# Altium PCB My_PCB.PcbDoc (part 1 of 2)
Units mil, origin at the board's own origin, x right, y up, seen from the top; angles counter-clockwise.
Board outline 2405.51 x 3023.62 mil, 6 copper layers (L1 HS signal, L2 GND, L3 Signal, L4 5V, L5 Signal, L6 Signal), stack 61.068 mil thick; 56 components, 70 nets, 272 pads, 60 vias.
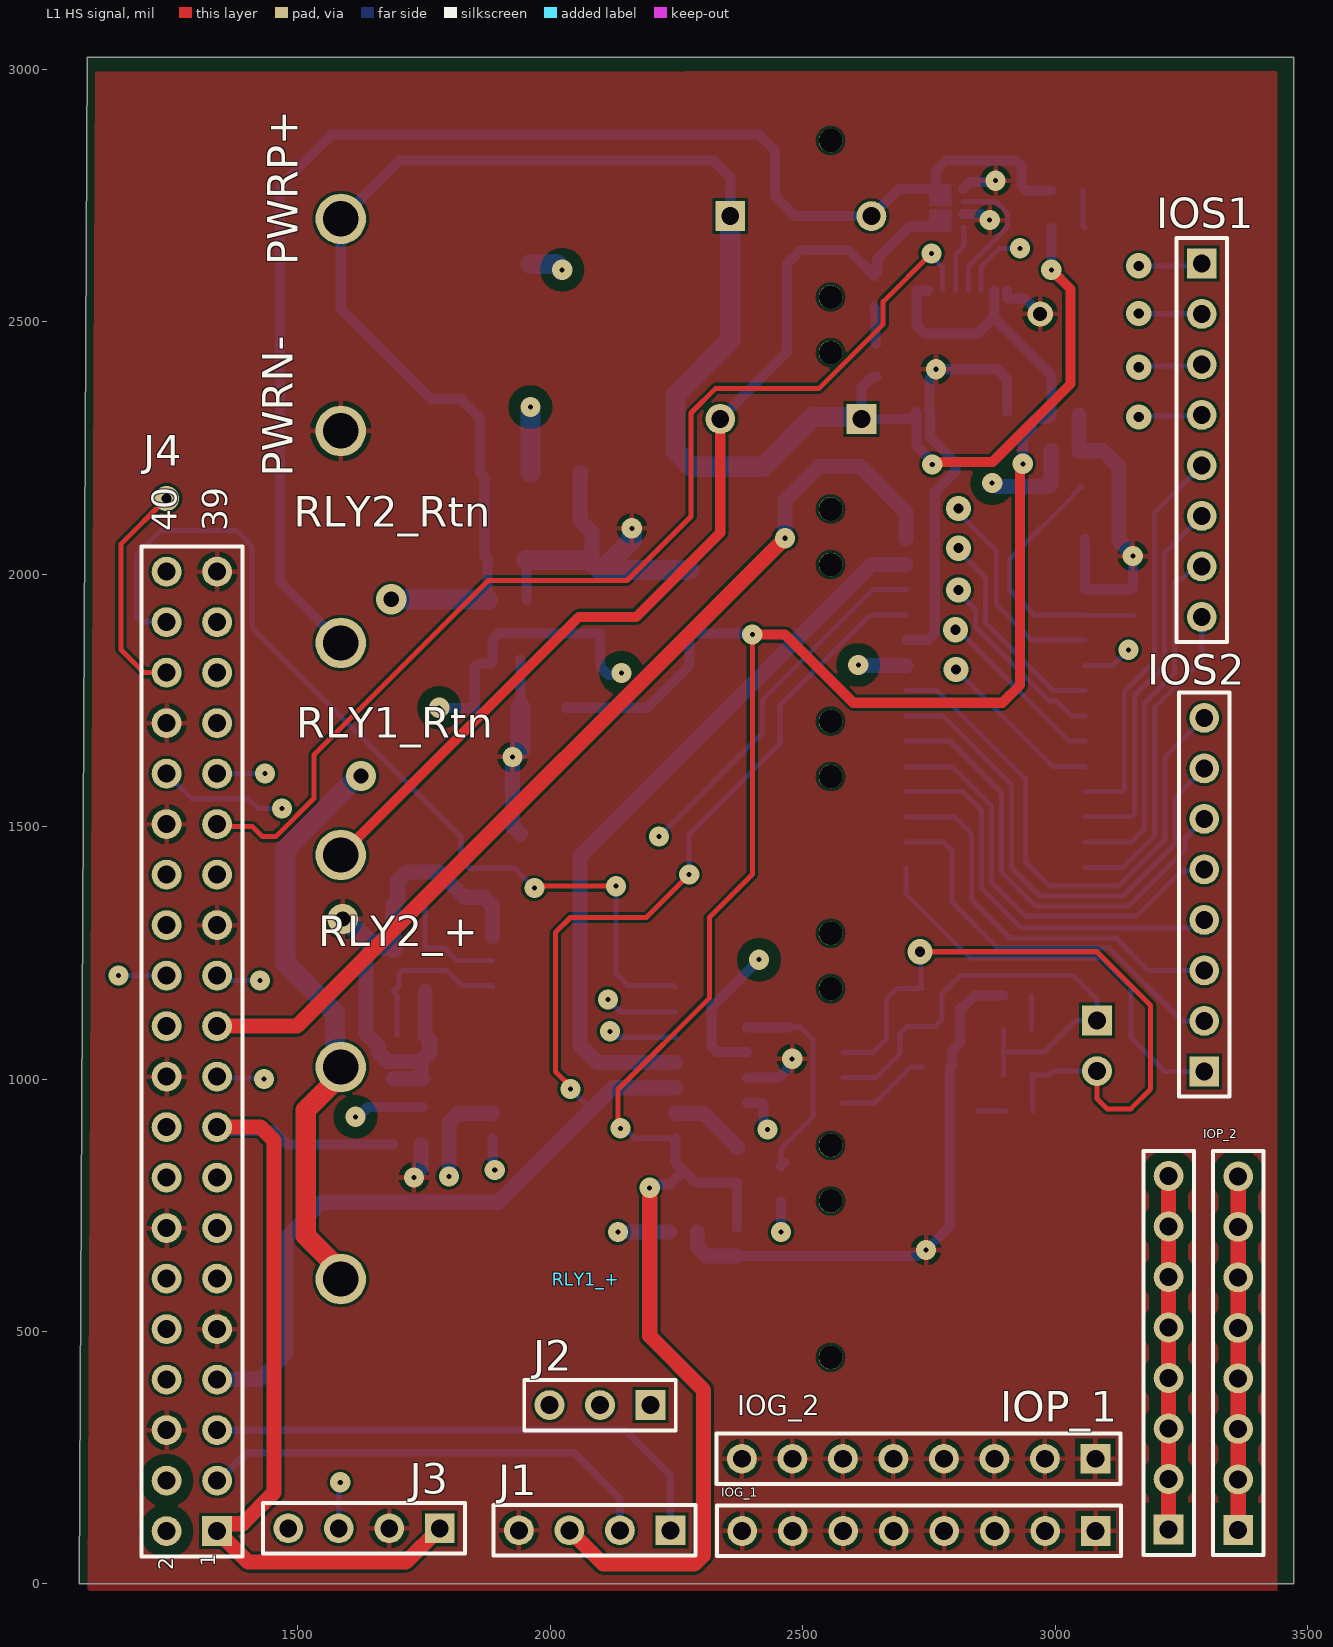
[diagram p0: L1 HS signal view]
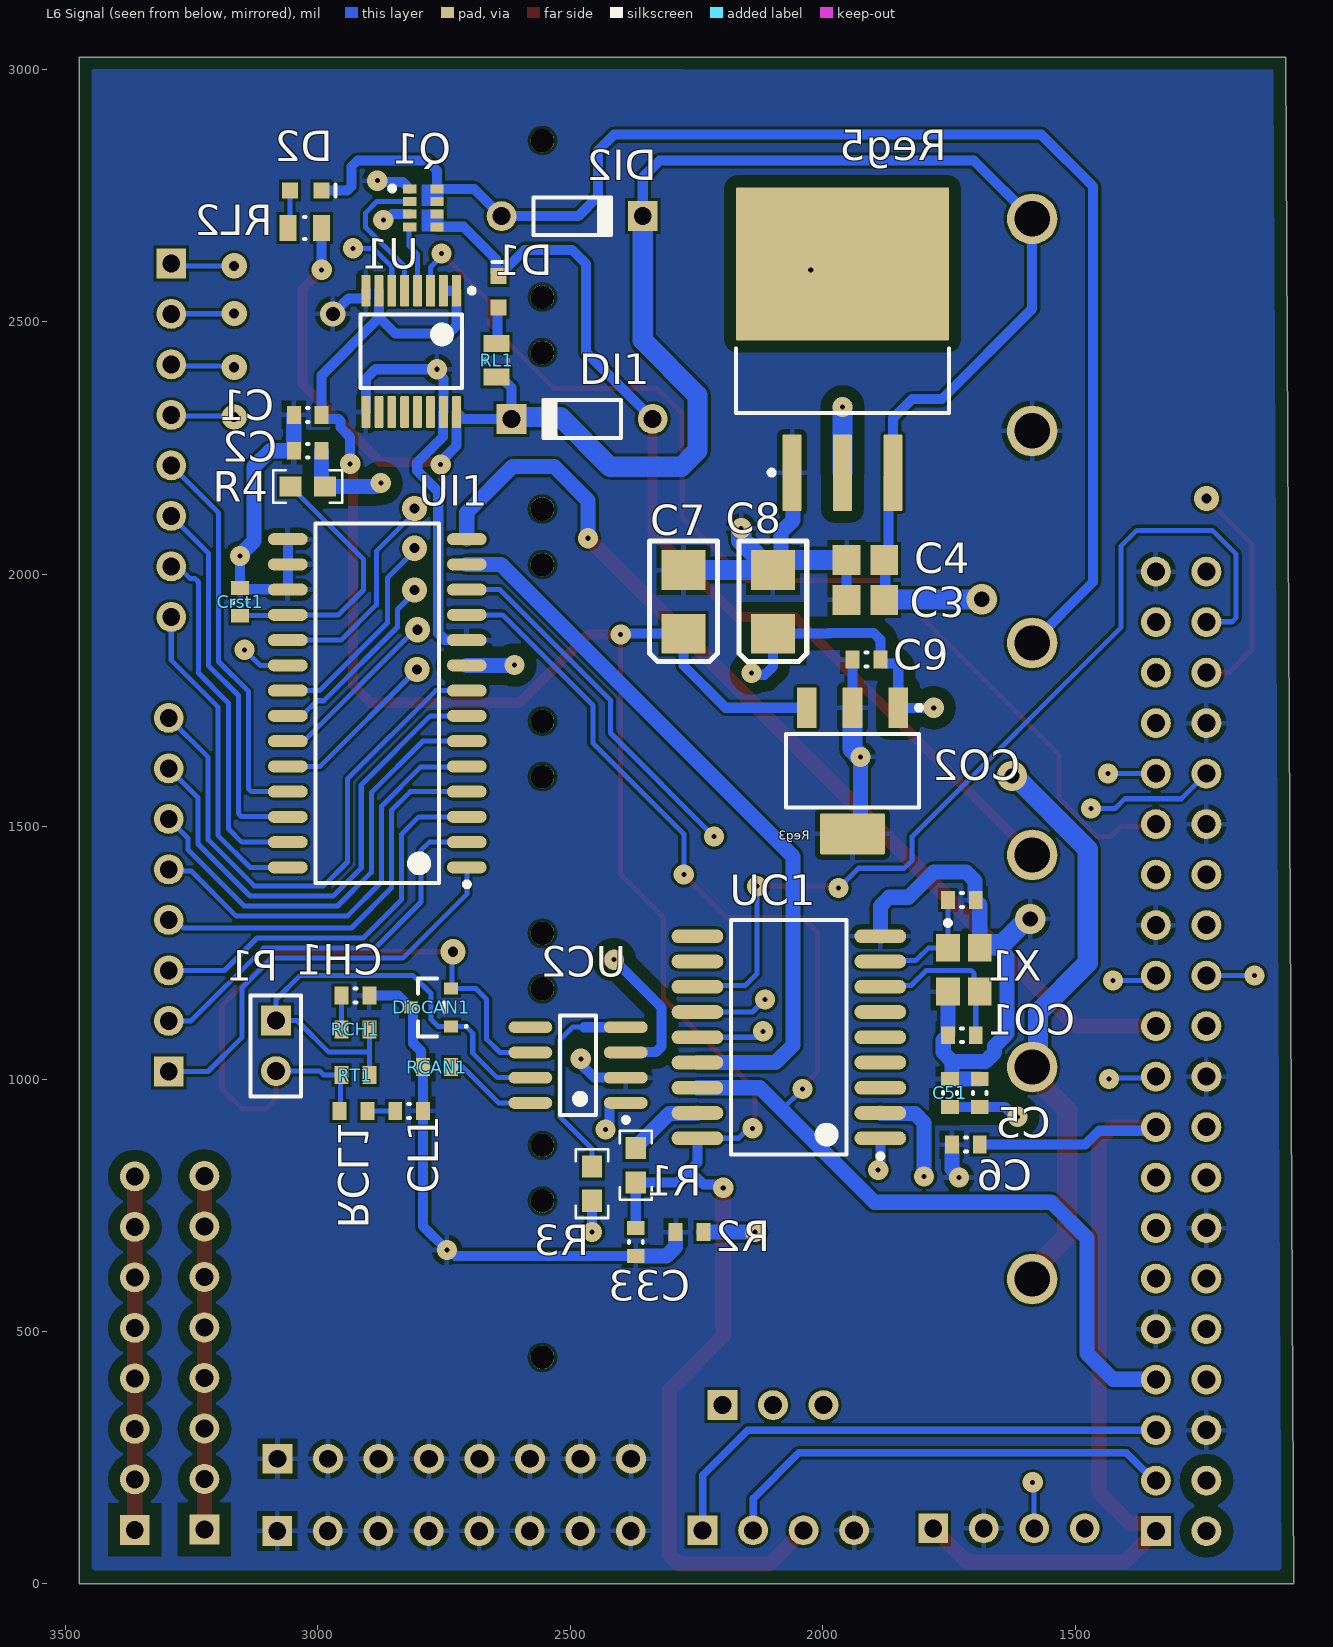
[diagram p1: L6 Signal view, seen from below]
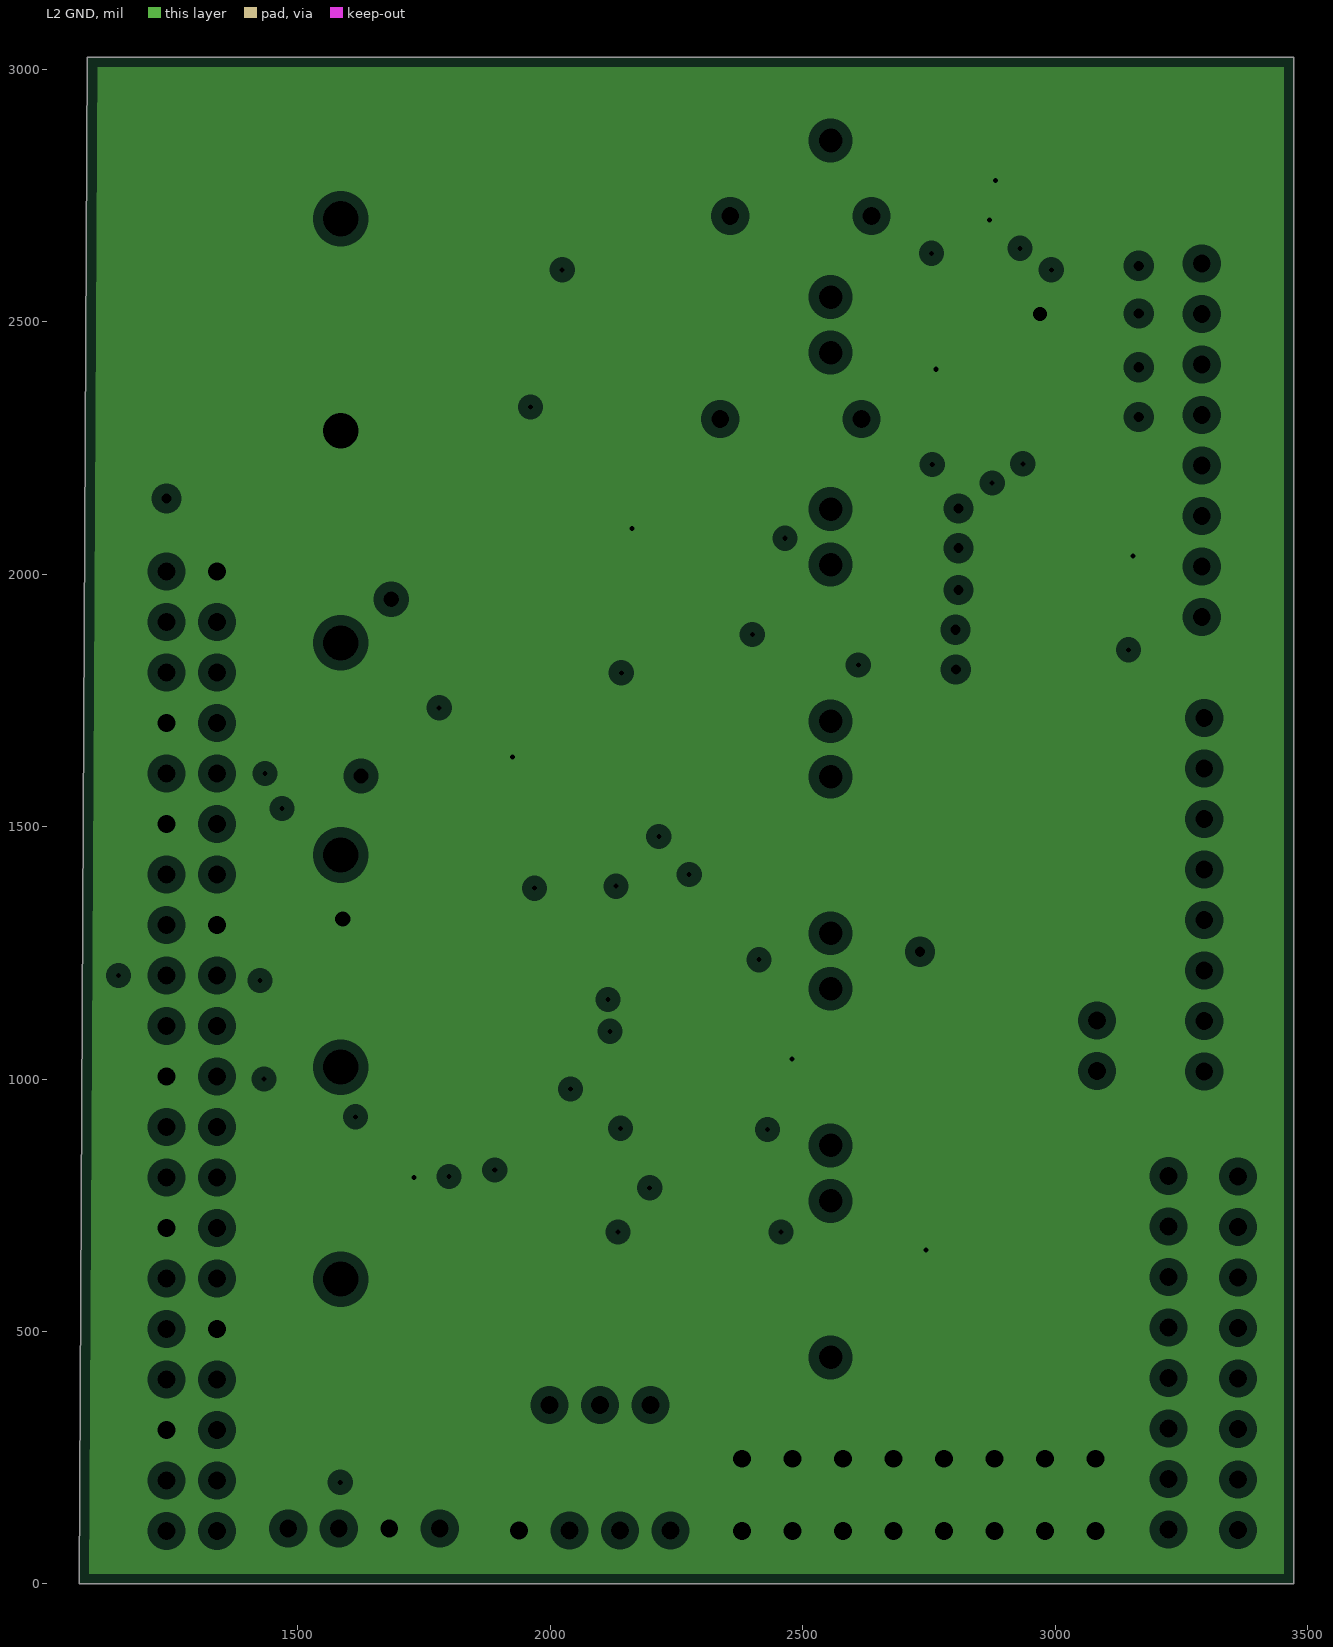
[diagram p2: L2 GND, clearances drawn from the general rule]
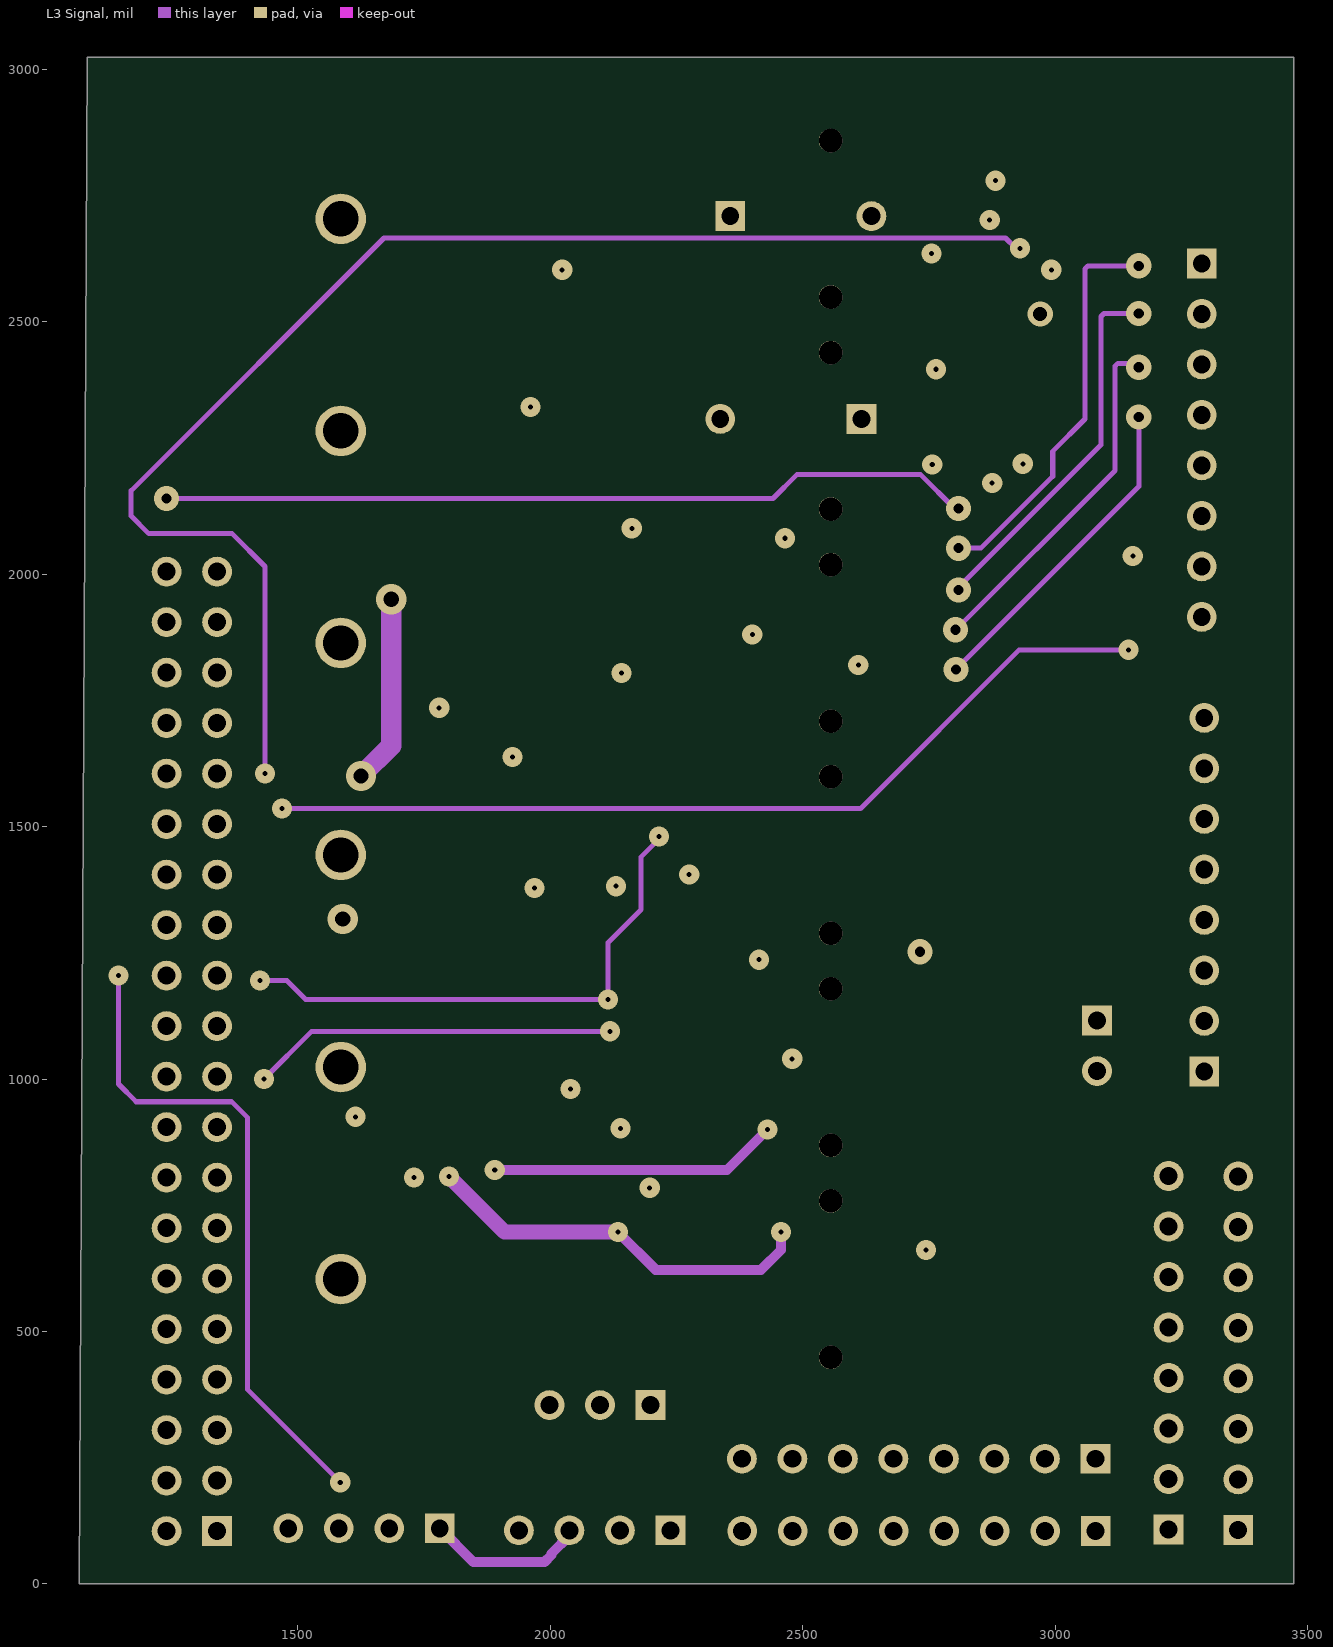
[diagram p3: L3 Signal]
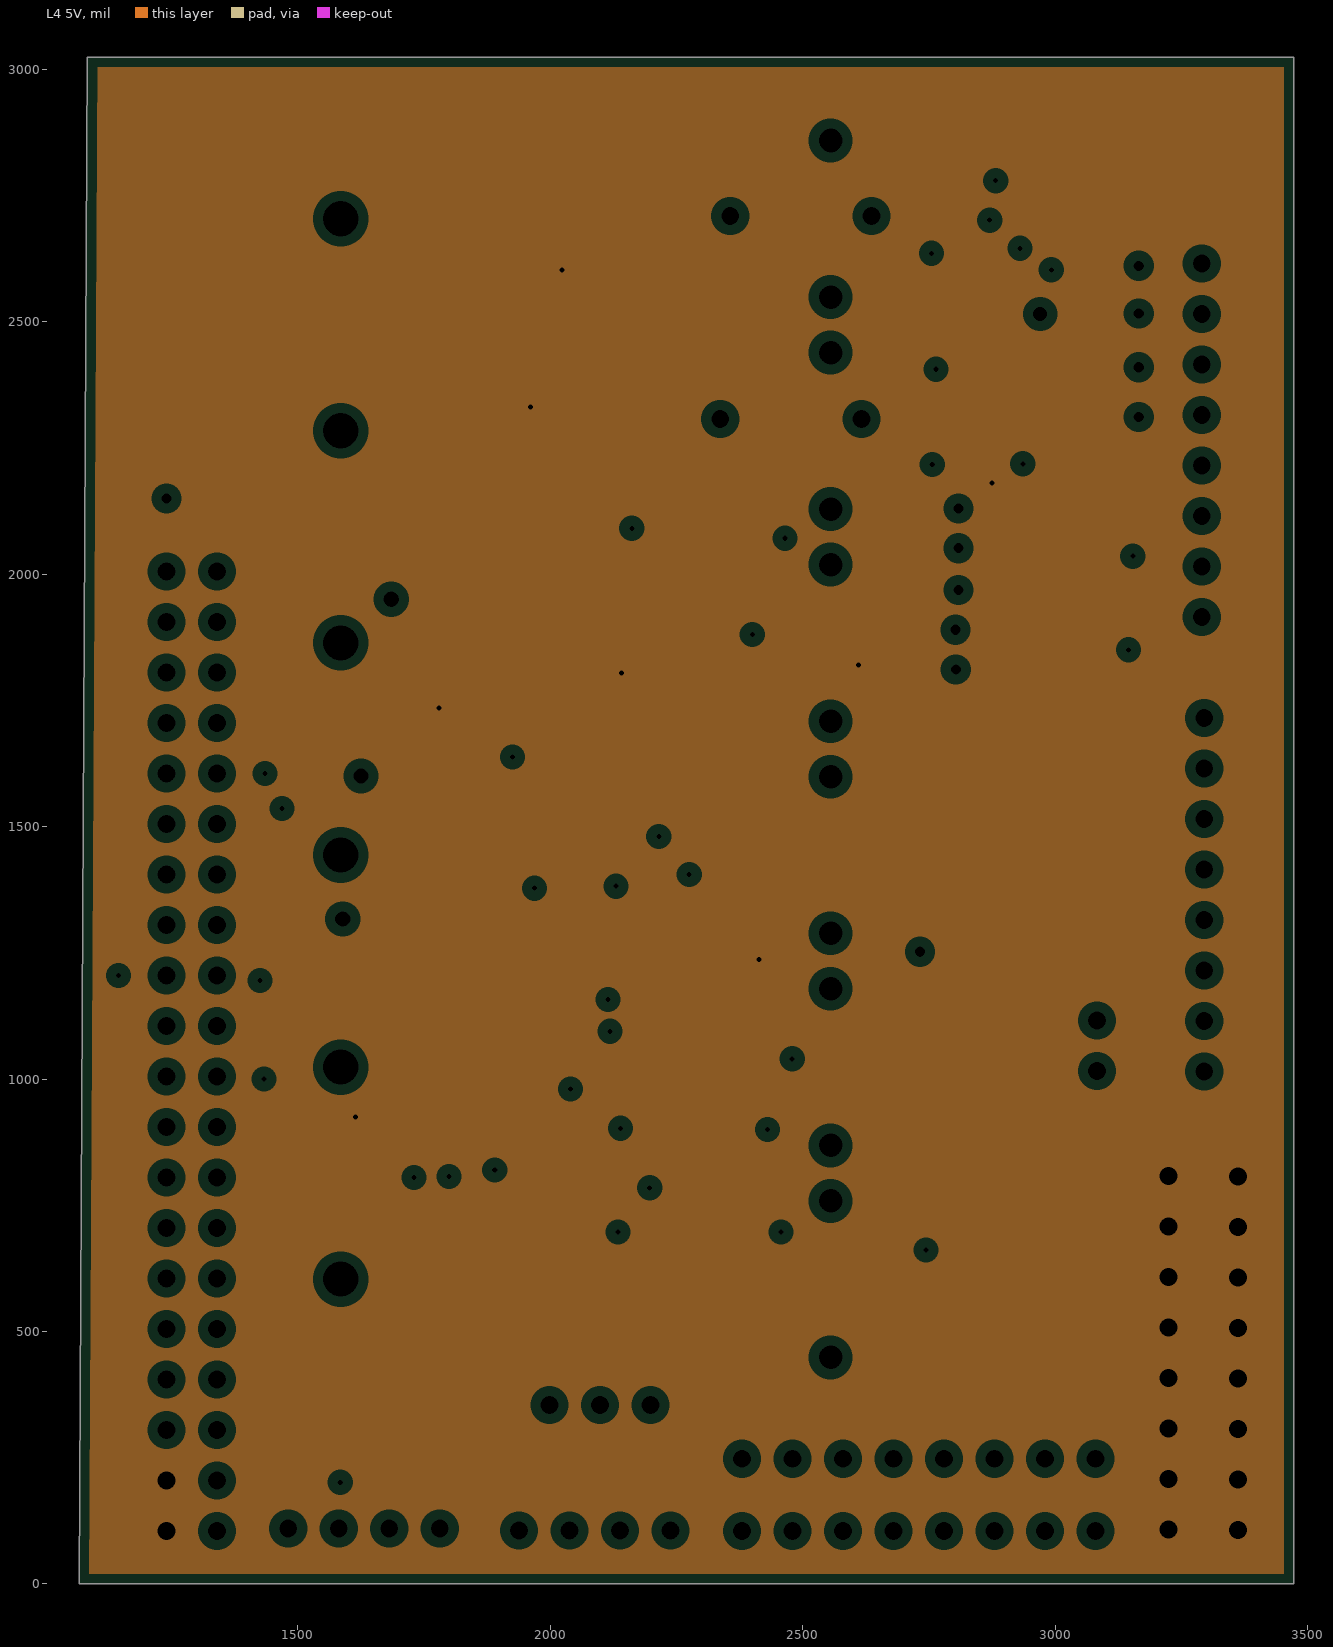
[diagram p4: L4 5V, clearances drawn from the general rule]

## Layer stack, top to bottom
Top Solder: solder mask 1, SM-001, Dk 4
L1 HS signal: signal copper 1.378
Dielectric 1: prepreg 2.8, PP-006, Dk 4.1
Dielectric 2: prepreg 2.8, PP-006, Dk 4.1
L2 GND: plane copper 1.378, net GND
Dielectric 3: core 18, Core-035, Dk 4.7
L3 Signal: signal copper 1.378
Dielectric 4: prepreg 2.8, PP-006, Dk 4.1
Dielectric 5: prepreg 2.8, PP-006, Dk 4.1
L4 5V: plane copper 1.378, net 5V
Dielectric 6: core 18, Core-035, Dk 4.7
L5 Signal: signal copper 1.378
Dielectric 7: prepreg 2.8, PP-006, Dk 4.1
Dielectric 8: prepreg 2.8, PP-006, Dk 4.1
L6 Signal: signal copper 1.378
Bottom Solder: solder mask 1, SM-001, Dk 4

## Board outline
1066.93,0 3472.44,0 3472.44,3023.62 1083.95,3023.62 1082.86,3022.54

## Design rules (kind name [scope] priority, off if disabled: settings)
AssemblyTestPointUsage [All] p1: valid=2
Clearance Power [InNet('5V') vs InNet('GND')] p1: gap=23 ignorepadtopadclearanceinfootprint=FALSE
Clearance Clearance_1 [All] p2: gap=5.5 ignorepadtopadclearanceinfootprint=FALSE
Clearance "Schematic Clearance Constraint" [InNetClass('CAN')] p3: gap=20 ignorepadtopadclearanceinfootprint=FALSE
ComponentClearance [(ObjectKind = 'Component') And (Footprint = 'Anderson_Red_RHT_BOT') vs (ObjectKind = 'Component') And (Footprint = 'Anderson_BLK_RHT_BOT')] p1: gap=10 collisioncheckmode=3 verticalgap=10 showdistances=TRUE
DiffPairsRouting [All] p1: maxlimit=10 minlimit=10 mostfreqgap=10 toplayer_minwidth=15 toplayer_maxwidth=15 toplayer_prefwidth=15 midlayer1_minwidth=15 midlayer1_maxwidth=15 midlayer1_prefwidth=15 midlayer2_minwidth=15 midlayer2_maxwidth=15 midlayer2_prefwidth=15 bottomlayer_minwidth=15 bottomlayer_maxwidth=15 bottomlayer_prefwidth=15 maxuncoupledlength=500
MinimumSolderMaskSliver [All] p1: minsoldermaskwidth=5
PlaneClearance [All] p1: clearance=20
PlaneConnect [All] p1: planeconnectstyle=Relief reliefexpansion=20 reliefentries=4 reliefconductorwidth=10 reliefairgap=10
PolygonConnect [All] p1: connectstyle=Relief reliefconductorwidth=10 reliefentries=4 polygonreliefangle="90 Angle" airgapwidth=10
RoutingVias [All] p1: holewidth=20 width=50 viastyle="Through Hole" minholewidth=10 minwidth=40 maxholewidth=30 maxwidth=60
SilkToSilkClearance [All] p1: silktosilkclearance=1
SilkToSolderMaskClearance [IsPad] p1: minsilkscreentomaskgap=2 clearancetoexposedcopper=TRUE
SolderMaskExpansion [All] p1: expansion=4 istentingtop=FALSE
Width Fonte [InNetClass('Fonte')] p1: maxlimit=40 minlimit=20 preferedwidth=30
Width "Schematic Width Constraint_2" [InNet('5V')] p2: maxlimit=30 minlimit=10 preferedwidth=20
Width "Schematic Width Constraint_1" [InNet('3V3')] p3: maxlimit=30 minlimit=10 preferedwidth=20
Width "Schematic Width Constraint" [InNetClass('CAN')] p4: maxlimit=30 minlimit=10 preferedwidth=20
22 further rules are at their usual default settings.

## Classes and differential pairs
net class PowerNets: NetD1_1 NetD2_1
net class RELAY[1..2]: RELAY1 RELAY2
net class Fonte: 5V 12V GND
net class CAN: CAN_RXD CAN_TXD CANH CANL
component class Relay_IO: D1 D2 DI1 DI2 Q1 RL1 RL2 RLY1_+ RLY1_Rtn RLY2_+ RLY2_Rtn U1
component class Processor_Interface: C5 C6 J4
component class "Power Supply": C3 C4 C7 C8 C9 PWRN- PWRP+ Reg3 Reg5
component class Digital_IO: C1 C2 Crst1 IOG_1 IOG_2 IOP_1 IOP_2 IOS1 IOS2 J1 J2 J3 R4 RRst3 UI1
component class CAN_Interface: C33 C51 CH1 CL1 CO1 CO2 P1 R1 R2 R3 RCAN1 RCH1 RCL1 RRst1 RRst2 RT1 UC1 UC2 X1
differential pair CLK: +CLK_P -CLK_N

## Components (designator, comment, footprint, x,y, rotation, side; value= is the part's Value field where it differs from the comment)
C1 "100nF 50V" 0603C_L 3019.69,2314.96 r180 bottom
C2 "100nF 50V" 0603C_L 3019.69,2244.09 r180 bottom
C3 "10µF" CAPC2013X135X45ML10T25 1915.35,1948.82 r180 bottom
C4 "10µF" CAPC2013X135X45ML10T25 1915.35,2027.56 r180 bottom
C5 "100nF 50V" 0603C_L 1688.98,972.44 r270 bottom
C6 "100nF 50V" 0603C_L 1716.54,870.08 r180 bottom
C7 "33uF" AVX-CAPC3528_V 2275.59,1944.88 r90 bottom
C8 "10uF" AVX-CAPC3528_V 2098.43,1944.88 r90 bottom
C9 "100nF 50V" 0603C_L 1913.39,1830.71 r180 bottom
C33 "0.1uF" 0603C_L 2370.08,677.17 r90 bottom
C51 "0.1uF" 0603C_L 1748.03,972.44 r270 bottom
CH1 "560pF 25V 0603" 0603C_L 2925.2,1165.35 r180 bottom
CL1 "560pF 25V 0603" 0603C_L 2818.9,937.01 r0 bottom
CO1 "22pF" 0603C_L 1724.41,1086.61 r180 bottom
CO2 "22pF" 0603C_L 1724.41,1354.33 r180 bottom
Crst1 "100nF 50V" 0603C_L 3153.54,1944.88 r270 bottom
D1 "LED Red" 0603_A 2641.73,2559.06 r270 bottom
D2 "LED Red" 0603_A 3023.62,2759.84 r0 bottom
DI1 "100V 1A Fast Diode" DO-35 2476.38,2307.09 r0 bottom
DI2 "100V 1A Fast Diode" DO-35 2496.06,2708.66 r180 bottom
DioCAN1 "100V 1A Fast Diode" SOT23 2775.59,1141.73 r0 bottom
IOG_1 "Header 8" HDR1X8 3080,105 r180 top
IOG_2 "Header 8" HDR1X8 3079.53,248.03 r180 top
IOP_1 "Header 8" HDR1X8 3224.41,107.87 r90 top
IOP_2 "Header 8" HDR1X8 3362.2,107.09 r90 top
IOS1 "Header 8" HDR1X8 3290,2615 r270 top
IOS2 "Header 8" HDR1X8 3295,1015 r90 top
J1 "Header 4" HDR1X4 2237.8,106.3 r180 top
J2 "Header 3" HDR1X3 2198.43,354.33 r180 top
J3 "Header 4" HDR1X4 1781.1,110.24 r180 top
J4 "Header 20X2" HDR2X20 1340.16,104.72 r90 top
P1 "Header 2" HDR1X2 3082.68,1115.75 r270 bottom
PWRN- "BLK_PCB_RHT" Anderson_BLK_RHT_BOT 1585.12,2283.38 r180 top
PWRP+ "RED_PCB_RHT" Anderson_Red_RHT_BOT 1585.12,2703.27 r180 top
Q1 "NTHD4508NT1" ONSC-CHIPFET-8-1206A-03_S2_V 2790.79,2725.1 r180 bottom
R1 "10K/1% - 0.1W" R0603 2370.08,829.28 r270 bottom value=10K
R2 "22K" 0603_L 2263.78,696.85 r180 bottom
R3 "10K/1% - 0.1W" R0603 2456.69,792.77 r90 bottom value=10K
R4 "10K/1% - 0.1W" R0603 3019.69,2173.23 r0 bottom value=10K
RCAN1 "4.7K" 0603_L 2763.78,1023.62 r180 bottom
RCH1 "100" 0603_L 2925.2,1098.43 r180 bottom
RCL1 "100" 0603_L 2929.14,937.01 r0 bottom
Reg3 "3.3V" DCY0004A_M 1940.94,1610.24 r270 bottom
Reg5 "LM1084IS-5.0/NOPB" KTT0003B_L 1960.63,2444.88 r90 bottom
RL1 "1K 0805" 0805_L 2645.67,2423.23 r270 bottom
RL2 "1K 0805" 0805_L 3025.59,2685.04 r180 bottom
RLY1_+ "Anderson-1Pin RED_PCB_RHT" Anderson_Red_RHT_BOT 1585.12,603.82 r180 top
RLY1_Rtn "Anderson-1Pin BLK_PCB_RHT" Anderson_BLK_RHT_BOT 1585.12,1443.6 r180 top
RLY2_+ "Anderson-1Pin RED_PCB_RHT" Anderson_Red_RHT_BOT 1585.12,1023.71 r180 top
RLY2_Rtn "Anderson-1Pin BLK_PCB_RHT" Anderson_BLK_RHT_BOT 1585.12,1863.49 r180 top
RT1 "22K" 0603_L 2925.2,1007.87 r180 bottom (schematic designator RTERM1)
U1 "CD40109BPW" PW0016A_M 2814.96,2440.94 r270 bottom
UC1 "MCP2515-E/SO" SOIC-SO18_M 2066.93,1082.68 r0 bottom
UC2 "MCP2551-E/SN" SOIC-SN8_N 2484.25,1027.56 r0 bottom
UI1 "MCP23S17T-E/SO" SOIC-SO28_L 2881.89,1744.09 r0 bottom
X1 "21C00047-16.000MHz" ITTI-21C00047-16.000MHz-4_V 1720.47,1216.54 r270 bottom

## Footprints (in the part's own frame and the unit in brackets; to place one, negate y for a bottom-side part, rotate by r counter-clockwise, add the part's x,y. Pads: shape width x height; smd on the part's side, far side on the other; paste and mask are expansions set on the pad)
0603_A [mm]
  rect 0.8x0.8 smd: 1(-0.8,0) 2(0.8,0)
  silkscreen extent -1.5,-0.3 -1.5,0.3, body extent -0.8,-0.4 0.8,0.4, height 0.7
0603_L [mm]
  rect 0.7x0.9 smd: 1(-0.7,0) 2(0.7,0)
  body extent -0.85,-0.47 0.85,0.47, height 0.6
0603C_L [mm]
  rect 0.7x0.9 smd: 1(-0.7,0) 2(0.7,0)
  silkscreen extent -0.05,-0.35 0.05,0.35, body extent -0.87,-0.47 0.88,0.48, height 1
0805_L [mm]
  rect 0.85x1.3 smd: 1(-0.85,0) 2(0.85,0)
  silkscreen extent -0.05,-0.55 0.05,0.55, body extent -1.1,-0.67 1.1,0.68, height 0.7
Anderson_BLK_RHT_BOT [mil]
  round 100 hole 70: 1(0,0)
  round 47 hole 47 unplated: MH(-970,-155) MH(-970,155)
  body extent -1360,-155 25,155, height 310
Anderson_Red_RHT_BOT [mil]
  round 100 hole 70: 1(0,0)
  round 47 hole 47 unplated: MH(-970,-155) MH(-970,155)
  body extent -1360,-155 25,155, height 310
AVX-CAPC3528_V [mm] "SMT Capacitor, 2 Leads, Body 3.5x2.8mm"
  rect 2x2.2 smd: 1(-1.6,0) 2(1.6,0)
  silkscreen extent -3,-1.7 3.05,1.7, body extent -1.79,-1.54 1.8,1.54, height 1.9
CAPC2013X135X45ML10T25 [mm] "Chip Capacitor, 2-Leads, Body 2.00x1.25mm, IPC Low Density"
  rect 1.4x1.5 smd: 1(-0.95,0) 2(0.95,0)
  body extent -1.05,-0.67 1.05,0.67, height 1.35
DCY0004A_M [mm] "SOT223, 4-Leads, Body 6.7x3.7mm, Pitch 2.3mm, IPC Low Density"
  rrect10% 2.05x1 smd: 1(-3.175,2.3) 2(-3.175,0) 3(-3.175,-2.3)
  rrect5% 2.05x3.25 smd: 4(3.175,0)
  silkscreen extent -3.3,-3.35 1.85,3.47, body extent -3.5,-3.25 3.5,3.25, height 1.62
DO-35 [mm]
  round 1.5 hole 0.9: 1(-3.55,0)
  rect 1.5x1.5 hole 0.9: 2(3.55,0)
  silkscreen extent -1.95,-0.95 2.05,0.95
HDR1X2 [mm] "Connector; Header; 2 Position"
  rect 1.5x1.5 hole 0.9: 1(0,0)
  round 1.5 hole 0.9: 2(2.54,0)
  silkscreen extent -1.27,-1.27 3.81,1.27
HDR1X3 [mm] "Connector; Header; 3 Position"
  rect 1.5x1.5 hole 0.9: 1(0,0)
  round 1.5 hole 0.9: 2(2.54,0) 3(5.08,0)
  silkscreen extent -1.27,-1.27 6.35,1.27
HDR1X4 [mm] "Connector; Header; 4 Position"
  rect 1.5x1.5 hole 0.9: 1(0,0)
  round 1.5 hole 0.9: 2(2.54,0) 3(5.08,0) 4(7.62,0)
  silkscreen extent -1.27,-1.27 8.89,1.27
HDR1X8 [mm] "Connector; Header; 8 Position"
  rect 1.5x1.5 hole 0.9: 1(0,0)
  round 1.5 hole 0.9: 2(2.54,0) 3(5.08,0) 4(7.62,0) 5(10.16,0) 6(12.7,0) 7(15.24,0) 8(17.78,0)
  silkscreen extent -1.27,-1.27 19.05,1.27
HDR2X20 [mm] "Connector; Header; 20x2 Position"
  rect 1.5x1.5 hole 0.9: 1(0,0)
  round 1.5 hole 0.9: 2(0,2.54) 3(2.54,0) 4(2.54,2.54) 5(5.08,0) 6(5.08,2.54) 7(7.62,0) 8(7.62,2.54) 9(10.16,0) 10(10.16,2.54) 11(12.7,0) 12(12.7,2.54) 13(15.24,0) 14(15.24,2.54) 15(17.78,0) 16(17.78,2.54) 17(20.32,0) 18(20.32,2.54) 19(22.86,0) 20(22.86,2.54) 21(25.4,0) 22(25.4,2.54) 23(27.94,0) 24(27.94,2.54) 25(30.48,0) 26(30.48,2.54) 27(33.02,0) 28(33.02,2.54) 29(35.56,0) 30(35.56,2.54) 31(38.1,0) 32(38.1,2.54) 33(40.64,0) 34(40.64,2.54) 35(43.18,0) 36(43.18,2.54) 37(45.72,0) 38(45.72,2.54) 39(48.26,0) 40(48.26,2.54)
  silkscreen extent -1.27,-1.27 49.53,3.81
ITTI-21C00047-16.000MHz-4_V [mm] "Hand Drawn, 4-Leads, Body 3.2x2.5 mm"
  rect 1.4x1.2 smd: 1(-1.1,-0.8) 2(1.1,-0.8) 3(1.1,0.8) 4(-1.1,0.8)
  silkscreen extent -2.47,-0.93 -2.23,-0.68, body extent -1.6,-1.25 1.6,1.25, height 0.9
KTT0003B_L [mm] "DPAK, 3-Leads, Body 10.65x9.65mm, Pitch 2.54mm, IPC High Density"
  rrect11% 3.85x0.95 smd: 1(-6.2,2.54) 2(-6.2,0) 3(-6.2,-2.54)
  rrect1% 7.7x10.7 smd: 4(4.3,0)
  silkscreen extent -6.32,-5.35 0.05,5.35, body extent -7.8,-5.08 6.5,5.08, height 4.72
ONSC-CHIPFET-8-1206A-03_S2_V [mil]
  rect 25.98x17.99 smd: 1(-27.01,37.5) 2(-27.01,12.5) 3(-27.01,-12.5) 4(-27.01,-37.5) 5(27.01,-37.5) 6(27.01,-12.5) 7(27.01,12.5) 8(27.01,37.5)
  L1 HS signal region: -4.02,-3.5 40,-3.5 40,-46.5 -4.02,-46.5
  L1 HS signal region: -4.02,46.5 40,46.5 40,3.5 -4.02,3.5
  silkscreen extent -67,33 -57,43, body extent -32,-60 32,60, height 43
PW0016A_M [mm] "SOP, 16-Leads, Body 5.1x4.5mm, Pitch 0.65mm, IPC Low Density"
  rrect22% 1.6x0.45 smd: 1(-3.05,2.275) 2(-3.05,1.625) 3(-3.05,0.975) 4(-3.05,0.325) 5(-3.05,-0.325) 6(-3.05,-0.975) 7(-3.05,-1.625) 8(-3.05,-2.275) 9(3.05,-2.275) 10(3.05,-1.625) 11(3.05,-0.975) 12(3.05,-0.325) 13(3.05,0.325) 14(3.05,0.975) 15(3.05,1.625) 16(3.05,2.275)
  silkscreen extent -3.17,-2.55 1.85,3.17, body extent -3.21,-2.5 3.21,2.5, height 1
R0603 [mil]
  rect 44x40 smd: 1(-34,0) 2(34,0)
  silkscreen extent -68,-32 68,32, body extent -33,-16 33,16, height 26
SOIC-SN8_N [mm] "SOIC, 8-Leads, Body 4.9x3.9mm, Pitch 1.27mm, IPC Medium Density"
  oval 2.2x0.6 smd: 1(-2.4,1.905) 2(-2.4,0.635) 3(-2.4,-0.635) 4(-2.4,-1.905) 5(2.4,-1.905) 6(2.4,-0.635) 7(2.4,0.635) 8(2.4,1.905)
  silkscreen extent -2.52,-2.5 0.9,2.88, body extent -2,-2.5 2,2.5, height 1.75
SOIC-SO18_M [mm] "SOIC, 18-Leads, Body 11.6x7.5mm, Pitch 1.27mm, IPC Low Density"
  oval 2.6x0.7 smd: 1(-4.6,5.08) 2(-4.6,3.81) 3(-4.6,2.54) 4(-4.6,1.27) 5(-4.6,0) 6(-4.6,-1.27) 7(-4.6,-2.54) 8(-4.6,-3.81) 9(-4.6,-5.08) 10(4.6,-5.08) 11(4.6,-3.81) 12(4.6,-2.54) 13(4.6,-1.27) 14(4.6,0) 15(4.6,1.27) 16(4.6,2.54) 17(4.6,3.81) 18(4.6,5.08)
  silkscreen extent -4.72,-5.9 2.9,6.1, body extent -3.8,-5.87 3.8,5.87, height 2.65
SOIC-SO28_L [mm] "SOIC, 28-Leads, Body 17.9x7.5mm, Pitch 1.27mm, IPC High Density"
  oval 2x0.6 smd: 1(-4.5,8.255) 2(-4.5,6.985) 3(-4.5,5.715) 4(-4.5,4.445) 5(-4.5,3.175) 6(-4.5,1.905) 7(-4.5,0.635) 8(-4.5,-0.635) 9(-4.5,-1.905) 10(-4.5,-3.175) 11(-4.5,-4.445) 12(-4.5,-5.715) 13(-4.5,-6.985) 14(-4.5,-8.255) 15(4.5,-8.255) 16(4.5,-6.985) 17(4.5,-5.715) 18(4.5,-4.445) 19(4.5,-3.175) 20(4.5,-1.905) 21(4.5,-0.635) 22(4.5,0.635) 23(4.5,1.905) 24(4.5,3.175) 25(4.5,4.445) 26(4.5,5.715) 27(4.5,6.985) 28(4.5,8.255)
  silkscreen extent -4.62,-9.05 3.1,9.23, body extent -3.8,-9.05 3.8,9.05, height 2.65
SOT23 [mm]
  rect 0.7x0.6 smd paste-0.05: 1(-1,0.95) 2(-1,-0.95) 3(1,0)
  silkscreen extent -1.79,-1.45 0.65,1.45, body extent -1.3,-1.5 1.3,1.5, height 1.1

## Part data
C1 C2 C5 C6 C9 Crst1: library part Cap100nF_50V_0603, Capacitance=0.10µF, Manufacturer=Yageo, Manufacturer Part Number=CC0603ZRY5V9BB104, Operating Temperature="-30°C ~ 85°C", Package / Case="0603 (1608 Metric)", Ratings=-, Supplier Part Number 1=311-1343-1-ND, Temperature Coefficient="Y5V (F)", Tolerance="-20%, +80%", Voltage - Rated=50V, Applications="General Purpose", Category=Capacitors, ComponentLink1Description=http://www.yageo.com/documents/recent/UPY-GPHC_Y5V_6.3V-to-50V_6.pdf, ComponentLink1URL=http://www.yageo.com/documents/recent/UPY-GPHC_Y5V_6.3V-to-50V_6.pdf, Failure Rate=-, Features=-, Height - Seated (Max)=-, Lead Spacing=-, Lead Style=-, Mounting Type="Surface Mount, MLCC", Packaging="Cut Tape (CT)", Part Status=Active, Pricing 1="1=0.1, 10=0.018, 25=0.0128, 100=0.0082, 250=0.00672, 500=0.00574, 1000=0.00447 (USD)", RoHS="RoHS Compliant", Size / Dimension="0.063\" L x 0.031\" W (1.60mm x 0.80mm)", Stock 1=1827128, Supplier 1=Digi-Key, Thickness (Max)="0.035\" (0.90mm)"
C3 C4: library part CMP-2007-03541-1, Manufacturer=Murata, Manufacturer Part Number=GRM21BR61E106KA73L, Operating Temperature="-55°C ~ 85°C", Package / Case="0805 (2012 Metric)", Ratings=-, Standard Package=1, Supplier Part Number 1=490-5523-1-ND, Temperature Coefficient=X5R, Tolerance=±10%, Voltage - Rated=25V, Applications="General Purpose", Capacitance=10µF, Catalog Drawings="GRM Series_0805_1.25", Category=Capacitors, ComponentLink1Description=https://datasheet.ciiva.com/139/partnumbering-e-01-139184.pdf, ComponentLink1URL=https://datasheet.ciiva.com/139/partnumbering-e-01-139184.pdf, ComponentLink2Description=https://datasheet.ciiva.com/28584/626718-28584288.pdf, ComponentLink2URL=https://datasheet.ciiva.com/28584/626718-28584288.pdf, ComponentLink3Description=https://datasheet.ciiva.com/16440/grm21br61e106ka73l-16440627.pdf, ComponentLink3URL=https://datasheet.ciiva.com/16440/grm21br61e106ka73l-16440627.pdf, ComponentLink4Description=https://datasheet.ciiva.com/7719/1747469-7719093.pdf, ComponentLink4URL=https://datasheet.ciiva.com/7719/1747469-7719093.pdf, ComponentLink5Description=https://datasheet.ciiva.com/5424/product-5424327.pdf, ComponentLink5URL=https://datasheet.ciiva.com/5424/product-5424327.pdf, ComponentLink6Description=https://datasheet.ciiva.com/28584/626718-28584279.pdf, ComponentLink6URL=https://datasheet.ciiva.com/28584/626718-28584279.pdf, ComponentLink7Description=https://datasheet.ciiva.com/14116/grmseries-highdielectrictype-eng-14116376.pdf, ComponentLink7URL=https://datasheet.ciiva.com/14116/grmseries-highdielectrictype-eng-14116376.pdf, ComponentLink8Description=https://datasheet.ciiva.com/22774/1747469-22774396.pdf, ComponentLink8URL=https://datasheet.ciiva.com/22774/1747469-22774396.pdf, ComponentLink9Description=https://datasheet.ciiva.com/139/partnumbering-e-01-139182.pdf, ComponentLink9URL=https://datasheet.ciiva.com/139/partnumbering-e-01-139182.pdf, ComponentLink10Description=https://datasheet.ciiva.com/139/partnumbering-e-01-139183.pdf, ComponentLink10URL=https://datasheet.ciiva.com/139/partnumbering-e-01-139183.pdf, ComponentLink11Description=https://datasheet.ciiva.com/29199/454623-da-01-en-vs-kondensator-0805-29199615.pdf, ComponentLink11URL=https://datasheet.ciiva.com/29199/454623-da-01-en-vs-kondensator-0805-29199615.pdf, Family="Ceramic Capacitors", Features=-, Height - Seated (Max)=-, Lead Spacing=-, Lead Style=-, Mounting Type="Surface Mount, MLCC", Online Catalog="GRM Series", Other Names=490-5523-6, Packaging=Digi-Reel®, Part Number=GRM21BR61E106KA73L, Pricing 1="1=0.19, 10=0.13, 50=0.0748, 100=0.0618, 250=0.052, 500=0.0436, 1000=0.0358 (USD)", Product Training Modules="High-Cap Multilayer Ceramic Capacitors", Series=GRM, Size / Dimension="0.079\" L x 0.049\" W (2.00mm x 1.25mm)", Stock 1=750766, Supplier 1=Digikey, Thickness (Max)="0.053\" (1.35mm)"
C7: library part CMP-0279-00001-1, "Capacitor, Tantalum, 10uF 10% 20V MCCT-B (3528)", ESR (Equivalent Series Resistance)=-, Manufacturer="Kyocera / AVX", Manufacturer Part Number=TAJB336K006RNJ, Manufacturer Size Code=B, Operating Temperature="-55°C ~ 125°C", Package / Case="1210 (3528 Metric)", PCN Part Number="TAJ Series Suffix 08/Dec/2008", Standard Package=1, Supplier Part Number 1=478-8891-6-ND, Tolerance=±10%, Voltage - Rated=6.3V, Capacitance=33uF, Catalog Drawings="TAJ Series Side /  / TAJ Series", Category=Capacitors, ComponentLink1Description=https://datasheet.ciiva.com/11793/0900766b80ccdc61-11793299.pdf, ComponentLink1URL=https://datasheet.ciiva.com/11793/0900766b80ccdc61-11793299.pdf, ComponentLink2Description=https://datasheet.ciiva.com/7775/1680476-7775701.pdf, ComponentLink2URL=https://datasheet.ciiva.com/7775/1680476-7775701.pdf, ComponentLink3Description=https://datasheet.ciiva.com/7775/1680476-7775702.pdf, ComponentLink3URL=https://datasheet.ciiva.com/7775/1680476-7775702.pdf, ComponentLink4Description=https://datasheet.ciiva.com/7775/1680476-7775703.pdf, ComponentLink4URL=https://datasheet.ciiva.com/7775/1680476-7775703.pdf, ComponentLink5Description=https://datasheet.ciiva.com/28516/taj-28516106.pdf, ComponentLink5URL=https://datasheet.ciiva.com/28516/taj-28516106.pdf, ComponentLink6Description=https://datasheet.ciiva.com/12884/taj-27497-12884571.pdf, ComponentLink6URL=https://datasheet.ciiva.com/12884/taj-27497-12884571.pdf, ComponentLink7Description=https://datasheet.ciiva.com/29504/taj-29504347.pdf, ComponentLink7URL=https://datasheet.ciiva.com/29504/taj-29504347.pdf, ComponentLink8Description=https://datasheet.ciiva.com/29504/taj-29504348.pdf, ComponentLink8URL=https://datasheet.ciiva.com/29504/taj-29504348.pdf, ComponentLink9Description=https://datasheet.ciiva.com/29504/taj-29504349.pdf, ComponentLink9URL=https://datasheet.ciiva.com/29504/taj-29504349.pdf, ComponentLink10Description=https://datasheet.ciiva.com/16492/taj-16492862.pdf, ComponentLink10URL=https://datasheet.ciiva.com/16492/taj-16492862.pdf, Dynamic Catalog="TAJ Series", Failure Rate="General Purpose", Family="Tantalum Capacitors", Features="General Purpose", Height - Seated (Max)="0.083\" (2.10mm)", Lead Spacing=-, Lifetime @ Temp.=-, Mounting Type="Surface Mount", Other Names=478-8891-6, Packaging=Digi-Reel®, Pricing 1="1=0.67, 10=0.476, 25=0.4064, 50=0.36, 100=0.3136, 250=0.2671, 500=0.2323, 1000=0.1974 (USD)", Product Training Modules="Component Solutions for Smart Meter Applications", Series=TAJ, Size / Dimension="0.138\" L x 0.110\" W (3.50mm x 2.80mm)", Stock 1=0, Supplier 1=Digikey, Type=Molded
C8: library part CMP-0279-00001-1, "Capacitor, Tantalum, 10uF 10% 20V MCCT-B (3528)", Case Code=B, Case Style=Molded, Manufacturer=AVX, Manufacturer Part Number=TAJB106K020RNJ, Operating Temp Range="-55C to 125C", Package / Case=3528-21, PartNumber=TAJB106K020R, Rated Voltage=20V, Supplier Part Number 1=478-1674-6-ND, Tolerance=10%, Voltage=20VDC, Capacitance=10uF, ComponentLink1Description="Manufacturer URL", ComponentLink1URL=http://www.avx.com/, ComponentLink2Description=Datasheet, ComponentLink2URL=http://www.avx.com/docs/Catalogs/taj.pdf, ComponentLink3Description=https://datasheet.ciiva.com/11793/0900766b80ccdc61-11793072.pdf, ComponentLink3URL=https://datasheet.ciiva.com/11793/0900766b80ccdc61-11793072.pdf, ComponentLink4Description=https://datasheet.ciiva.com/14586/70001050-14586940.pdf, ComponentLink4URL=https://datasheet.ciiva.com/14586/70001050-14586940.pdf, ComponentLink5Description=https://datasheet.ciiva.com/16485/taj-16485899.pdf, ComponentLink5URL=https://datasheet.ciiva.com/16485/taj-16485899.pdf, ComponentLink6Description=https://datasheet.ciiva.com/5936/13070-5936843.pdf, ComponentLink6URL=https://datasheet.ciiva.com/5936/13070-5936843.pdf, ComponentLink7Description=https://datasheet.ciiva.com/3004/taj-3004427.pdf, ComponentLink7URL=https://datasheet.ciiva.com/3004/taj-3004427.pdf, ComponentLink8Description=https://datasheet.ciiva.com/16393/taj-16393850.pdf, ComponentLink8URL=https://datasheet.ciiva.com/16393/taj-16393850.pdf, ComponentLink9Description=https://datasheet.ciiva.com/3004/taj-3004426.pdf, ComponentLink9URL=https://datasheet.ciiva.com/3004/taj-3004426.pdf, ComponentLink10Description=https://datasheet.ciiva.com/18710/taj-eng-18710633.pdf, ComponentLink10URL=https://datasheet.ciiva.com/18710/taj-eng-18710633.pdf, ComponentLink11Description=https://datasheet.ciiva.com/12882/taj-27497-12882702.pdf, ComponentLink11URL=https://datasheet.ciiva.com/12882/taj-27497-12882702.pdf, ComponentLink12Description=https://datasheet.ciiva.com/7730/1826076-7730729.pdf, ComponentLink12URL=https://datasheet.ciiva.com/7730/1826076-7730729.pdf, ComponentLink13Description=https://datasheet.ciiva.com/14602/70001050-14602487.pdf, ComponentLink13URL=https://datasheet.ciiva.com/14602/70001050-14602487.pdf, ComponentLink14Description=https://datasheet.ciiva.com/7730/1826076-7730727.pdf, ComponentLink14URL=https://datasheet.ciiva.com/7730/1826076-7730727.pdf, ComponentLink15Description=https://datasheet.ciiva.com/26341/559425-da-01-en-tacc-b-3-2-mm-x-2-5-mm-x-1-9-mm-10-uf-26341766.pdf, ComponentLink15URL=https://datasheet.ciiva.com/26341/559425-da-01-en-tacc-b-3-2-mm-x-2-5-mm-x-1-9-mm-10-uf-26341766.pdf, ComponentLink16Description=https://datasheet.ciiva.com/7730/1826076-7730726.pdf, ComponentLink16URL=https://datasheet.ciiva.com/7730/1826076-7730726.pdf, ComponentLink17Description=https://datasheet.ciiva.com/263/taj-263492.pdf, ComponentLink17URL=https://datasheet.ciiva.com/263/taj-263492.pdf, ComponentLink18Description=https://datasheet.ciiva.com/263/taj-263491.pdf, ComponentLink18URL=https://datasheet.ciiva.com/263/taj-263491.pdf, ComponentLink19Description=https://datasheet.ciiva.com/263/taj-263490.pdf, ComponentLink19URL=https://datasheet.ciiva.com/263/taj-263490.pdf, ComponentLink20Description=https://datasheet.ciiva.com/7730/1826076-7730728.pdf, ComponentLink20URL=https://datasheet.ciiva.com/7730/1826076-7730728.pdf, ComponentLink21Description=https://datasheet.ciiva.com/26787/tajb106k020rnj-26787086.pdf, ComponentLink21URL=https://datasheet.ciiva.com/26787/tajb106k020rnj-26787086.pdf, Construction="SMT Chip", DatasheetVersion=Jun-13, DCL="2 uA", DF=6%, ESR="2.1 ohm", Failure Rate="Not Required", Insulation="Not Required", Lead Spacing (nom)="Not Required mm", Length W/Weld="Not Required mm", Length W/Weld (max)="Not Required mm", Mounting Style="Surface Mount", Mounting Technology="Surface Mount", PackageDescription="2-Pin SMT Capacitor, 3.5 x 2.8 mm Body", PackageReference=CAPC3528, Packaging="Tape and Reel", Polarity=Polarized, Pricing 1="1=0.65, 10=0.459, 25=0.392, 50=0.3472, 100=0.3024, 250=0.2576, 500=0.224, 1000=0.1904 (USD)", Product Depth (mm)="2.8 mm", Product Diameter (mm)="Not Required mm", Product Height (mm)="1.9 mm", Product Length (mm)="3.5 mm", Rad Hardened=No, Seal="Not Required", Seated Plane Height="Not Required mm", Stock 1=65037, Supplier 1=Digikey, Technology=Tantalum, Tolerance (+ or -)=10%, Wire Form="Not Required"
C33: library part Cap10uF_25V_0603, Capacitance=100nF, Case Code (Imperial)=0603, Case Code (Metric)=1608, Manufacturer=Kemet, Manufacturer Part Number=C0603C104J4RACTU, Max Operating Temperature=125°C, Min Operating Temperature=-55°C, Package Quantity=4000, Supplier Part Number 1=399-1097-1-ND, Tolerance=5%, Type (Capacitors)=X7R, Voltage Rating=16V, Case/Package=0603, ComponentLink1Description=https://datasheet.ciiva.com/14589/70095383-14589531.pdf, ComponentLink1URL=https://datasheet.ciiva.com/14589/70095383-14589531.pdf, ComponentLink2Description=https://datasheet.ciiva.com/28645/1851736-28645613.pdf, ComponentLink2URL=https://datasheet.ciiva.com/28645/1851736-28645613.pdf, ComponentLink3Description=https://datasheet.ciiva.com/5999/1732731-5999390.pdf, ComponentLink3URL=https://datasheet.ciiva.com/5999/1732731-5999390.pdf, ComponentLink4Description=https://datasheet.ciiva.com/7823/kem-c1002-x7r-smd-7823982.pdf, ComponentLink4URL=https://datasheet.ciiva.com/7823/kem-c1002-x7r-smd-7823982.pdf, Height=0.8mm, Length=1.6mm, Mount="Surface Mount", Packaging="Tape and Reel", Pins=2, Pricing 1="1=0.11, 10=0.078, 25=0.0572, 50=0.0446, 100=0.0369, 250=0.0305, 500=0.0259, 1000=0.0214 (USD)", Radiation Hardening=No, REACH SVHC="No SVHC", Stock 1=1096346, Supplier 1=Digikey, Voltage Rating (DC)=16V, Width=0.8mm
C51: library part Cap10uF_25V_0603
CH1 CL1: library part Cap560pF_25V_0603, Capacitance=10µF, Manufacturer="Taiyo Yuden", Manufacturer Part Number=TMK316F106ZL-T, Operating Temperature="-30°C ~ 85°C", Package / Case="1206 (3216 Metric)", Ratings=-, Standard Package=1, Supplier Part Number 1=587-1353-1-ND, Temperature Coefficient="Y5V (F)", Tolerance="-20%, +80%", Voltage - Rated=25V, Applications="General Purpose", Catalog Drawings="xMK Series_1206_1.6", Category=Capacitors, ComponentLink1Description=https://datasheet.ciiva.com/30217/73tmk316f106zl-t-30217817.pdf, ComponentLink1URL=https://datasheet.ciiva.com/30217/73tmk316f106zl-t-30217817.pdf, ComponentLink2Description=https://datasheet.ciiva.com/11596/tmk316f106zl-t-ss-11596490.pdf, ComponentLink2URL=https://datasheet.ciiva.com/11596/tmk316f106zl-t-ss-11596490.pdf, ComponentLink3Description=https://datasheet.ciiva.com/137/tmk316f106zl-t-ss-137061.pdf, ComponentLink3URL=https://datasheet.ciiva.com/137/tmk316f106zl-t-ss-137061.pdf, ComponentLink4Description=https://datasheet.ciiva.com/15922/1123tmk316f106zl-t-15922467.pdf, ComponentLink4URL=https://datasheet.ciiva.com/15922/1123tmk316f106zl-t-15922467.pdf, ComponentLink5Description=https://datasheet.ciiva.com/7975/746258-7975854.pdf, ComponentLink5URL=https://datasheet.ciiva.com/7975/746258-7975854.pdf, ComponentLink6Description=https://datasheet.ciiva.com/7975/1693457-7975853.pdf, ComponentLink6URL=https://datasheet.ciiva.com/7975/1693457-7975853.pdf, ComponentLink7Description=https://datasheet.ciiva.com/5744/1497285-5744889.pdf, ComponentLink7URL=https://datasheet.ciiva.com/5744/1497285-5744889.pdf, Family="Ceramic Capacitors", Features=-, Height - Seated (Max)=-, Lead Spacing=-, Lead Style=-, Mounting Type="Surface Mount, MLCC", Online Catalog="M Series", Other Names=587-1353-6, Packaging=Digi-Reel®, Pricing 1="1=0.34, 10=0.255, 50=0.1488, 100=0.119, 250=0.085, 500=0.0578, 1000=0.0468 (USD)", Series=M, Size / Dimension="0.126\" L x 0.063\" W (3.20mm x 1.60mm)", Stock 1=330483, Supplier 1=Ciiva, Thickness (Max)="0.071\" (1.80mm)"
CO1: library part Cap22pF_50V_0603, Capacitance=22, Case Code (Imperial)=0603, Case Code (Metric)=1608, Manufacturer=Murata, Manufacturer Part Number=GRM1885C1H220JA01D, Max Operating Temperature=125, Min Operating Temperature=-55, Package Quantity=1, Supplier Part Number 1=490-1411-1-ND, Tolerance=5, Type (Capacitors)=C0G, Voltage Rating=50, Case/Package=0603, ComponentLink1Description=https://datasheet.ciiva.com/131/product-131760.pdf, ComponentLink1URL=https://datasheet.ciiva.com/131/product-131760.pdf, ComponentLink2Description=https://datasheet.ciiva.com/131/partnumbering-e-01-131761.pdf, ComponentLink2URL=https://datasheet.ciiva.com/131/partnumbering-e-01-131761.pdf, ComponentLink3Description=https://datasheet.ciiva.com/14116/grmseries-tc-hitype-eng-14116853.pdf, ComponentLink3URL=https://datasheet.ciiva.com/14116/grmseries-tc-hitype-eng-14116853.pdf, ComponentLink4Description=https://datasheet.ciiva.com/3776/1156grm1885c1h220ja0123-3776984.pdf, ComponentLink4URL=https://datasheet.ciiva.com/3776/1156grm1885c1h220ja0123-3776984.pdf, ComponentLink5Description=https://datasheet.ciiva.com/14116/grmseries-tc-hitype-eng-14116826.pdf, ComponentLink5URL=https://datasheet.ciiva.com/14116/grmseries-tc-hitype-eng-14116826.pdf, ComponentLink6Description=https://datasheet.ciiva.com/11786/0900766b807a1cab-11786398.pdf, ComponentLink6URL=https://datasheet.ciiva.com/11786/0900766b807a1cab-11786398.pdf, ComponentLink7Description=https://datasheet.ciiva.com/131/partnumbering-e-01-131759.pdf, ComponentLink7URL=https://datasheet.ciiva.com/131/partnumbering-e-01-131759.pdf, Height=0.8, Lead Pitch=4, Length=1.6, Mount="Surface Mount", Packaging="Cut Tape", Pins=2, Pricing 1="1=0.1, 10=0.061, 50=0.0332, 100=0.0281, 250=0.023, 500=0.0196, 1000=0.0153 (USD)", Radiation Hardening=No, REACH SVHC="No SVHC", Stock 1=517556, Supplier 1=Digikey, Voltage Rating (DC)=50, Width=0.8
CO2: library part Cap100nF_50V_0603, Capacitance=22, Case Code (Imperial)=0603, Case Code (Metric)=1608, Manufacturer=Murata, Manufacturer Part Number=GRM1885C1H220JA01D, Max Operating Temperature=125, Min Operating Temperature=-55, Package Quantity=1, Supplier Part Number 1=490-1411-1-ND, Tolerance=5, Type (Capacitors)=C0G, Voltage Rating=50, Case/Package=0603, ComponentLink1Description=https://datasheet.ciiva.com/131/product-131760.pdf, ComponentLink1URL=https://datasheet.ciiva.com/131/product-131760.pdf, ComponentLink2Description=https://datasheet.ciiva.com/131/partnumbering-e-01-131761.pdf, ComponentLink2URL=https://datasheet.ciiva.com/131/partnumbering-e-01-131761.pdf, ComponentLink3Description=https://datasheet.ciiva.com/14116/grmseries-tc-hitype-eng-14116853.pdf, ComponentLink3URL=https://datasheet.ciiva.com/14116/grmseries-tc-hitype-eng-14116853.pdf, ComponentLink4Description=https://datasheet.ciiva.com/3776/1156grm1885c1h220ja0123-3776984.pdf, ComponentLink4URL=https://datasheet.ciiva.com/3776/1156grm1885c1h220ja0123-3776984.pdf, ComponentLink5Description=https://datasheet.ciiva.com/14116/grmseries-tc-hitype-eng-14116826.pdf, ComponentLink5URL=https://datasheet.ciiva.com/14116/grmseries-tc-hitype-eng-14116826.pdf, ComponentLink6Description=https://datasheet.ciiva.com/11786/0900766b807a1cab-11786398.pdf, ComponentLink6URL=https://datasheet.ciiva.com/11786/0900766b807a1cab-11786398.pdf, ComponentLink7Description=https://datasheet.ciiva.com/131/partnumbering-e-01-131759.pdf, ComponentLink7URL=https://datasheet.ciiva.com/131/partnumbering-e-01-131759.pdf, Height=0.8, Lead Pitch=4, Length=1.6, Mount="Surface Mount", Packaging="Cut Tape", Pins=2, Pricing 1="1=0.1, 10=0.061, 50=0.0332, 100=0.0281, 250=0.023, 500=0.0196, 1000=0.0153 (USD)", Radiation Hardening=No, REACH SVHC="No SVHC", Stock 1=517556, Supplier 1=Digikey, Voltage Rating (DC)=50, Width=0.8
D1 D2: library part LED_Red0603, "SMD mono-color Chip LED, WL-SMCW, Red", Color=Red, Current - Test=20mA, Lens Color=Colorless, Manufacturer="Wurth Electronics Inc", Manufacturer Part Number=150060RS75000, Millicandela Rating=250mcd, Package / Case="0603 (1608 Metric)", Supplier Device Package=0603, Supplier Part Number 1=732-4978-1-ND, Voltage - Forward (Vf) (Typ)=2V, Category=Optoelectronics, ComponentLink1Description=http://katalog.we-online.de/led/datasheet/150060RS75000.pdf, ComponentLink1URL=http://katalog.we-online.de/led/datasheet/150060RS75000.pdf, Features=-, Height (Max)=0.80mm, Lens Style/Size="Rectangle with Flat Top, 1.10mm x 0.70mm", Lens Transparency=Clear, Mounting Type="Surface Mount", Packaging="Cut Tape (CT)", Pricing 1="1=0.24, 50=0.21, 100=0.192, 500=0.174, 1000=0.162 (USD)", RoHS="RoHS Compliant", Size / Dimension="1.60mm L x 0.80mm W", Stock 1=22059, Supplier 1=Digi-Key, Viewing Angle=140°, Wavelength - Dominant=625nm, Wavelength - Peak=630nm
DI1 DI2: library part "Diode 1N4148", "High Conductance Fast Diode", Diode Case Style=DO-204AL, Forward Current If(AV)=1A, Forward Surge Current Ifsm Max=35A, Forward Voltage VF Max=1.25V, Manufacturer="ON Semiconductor", Manufacturer Part Number=MUR110RLG, Operating Temperature Max=175°C, Repetitive Reverse Voltage Vrrm Max=100V, Supplier Part Number 1=MUR110RLGOSCT-ND, ComponentLink1Description=https://datasheet.ciiva.com/915/mur120-d-915616.pdf, ComponentLink1URL=https://datasheet.ciiva.com/915/mur120-d-915616.pdf, ComponentLink2Description=https://datasheet.ciiva.com/30479/0900766b812212ee-30479481.pdf, ComponentLink2URL=https://datasheet.ciiva.com/30479/0900766b812212ee-30479481.pdf, ComponentLink3Description=https://datasheet.ciiva.com/25950/mur120-d-25950702.pdf, ComponentLink3URL=https://datasheet.ciiva.com/25950/mur120-d-25950702.pdf, ComponentLink4Description=https://datasheet.ciiva.com/16474/mur120-d-16474333.pdf, ComponentLink4URL=https://datasheet.ciiva.com/16474/mur120-d-16474333.pdf, ComponentLink5Description=https://datasheet.ciiva.com/915/mur120-d-915618.pdf, ComponentLink5URL=https://datasheet.ciiva.com/915/mur120-d-915618.pdf, ComponentLink6Description=https://datasheet.ciiva.com/915/mur120-d-915619.pdf, ComponentLink6URL=https://datasheet.ciiva.com/915/mur120-d-915619.pdf, ComponentLink7Description=https://datasheet.ciiva.com/16208/mur120-d-16208137.pdf, ComponentLink7URL=https://datasheet.ciiva.com/16208/mur120-d-16208137.pdf, Diode Configuration=Single, Diode Type="Fast Recovery", No. of Pins=2, Packaging=Each, Pricing 1="1=0.48, 10=0.362, 100=0.2254, 500=0.1541, 1000=0.1185 (USD)", Reverse Recovery Time trr Max=75ns, Stock 1=22453, Supplier 1=Ciiva, SVHC="No SVHC (16-Jun-2014)"
DioCAN1: library part PESD1CAN, "High Conductance Fast Diode", Diode Case Style=DO-204AL, Forward Current If(AV)=1A, Forward Surge Current Ifsm Max=35A, Forward Voltage VF Max=1.25V, Manufacturer="ON Semiconductor", Manufacturer Part Number=MUR110RLG, Operating Temperature Max=175°C, Repetitive Reverse Voltage Vrrm Max=100V, Supplier Part Number 1=MUR110RLGOSCT-ND, ComponentLink1Description=https://datasheet.ciiva.com/915/mur120-d-915616.pdf, ComponentLink1URL=https://datasheet.ciiva.com/915/mur120-d-915616.pdf, ComponentLink2Description=https://datasheet.ciiva.com/30479/0900766b812212ee-30479481.pdf, ComponentLink2URL=https://datasheet.ciiva.com/30479/0900766b812212ee-30479481.pdf, ComponentLink3Description=https://datasheet.ciiva.com/25950/mur120-d-25950702.pdf, ComponentLink3URL=https://datasheet.ciiva.com/25950/mur120-d-25950702.pdf, ComponentLink4Description=https://datasheet.ciiva.com/16474/mur120-d-16474333.pdf, ComponentLink4URL=https://datasheet.ciiva.com/16474/mur120-d-16474333.pdf, ComponentLink5Description=https://datasheet.ciiva.com/915/mur120-d-915618.pdf, ComponentLink5URL=https://datasheet.ciiva.com/915/mur120-d-915618.pdf, ComponentLink6Description=https://datasheet.ciiva.com/915/mur120-d-915619.pdf, ComponentLink6URL=https://datasheet.ciiva.com/915/mur120-d-915619.pdf, ComponentLink7Description=https://datasheet.ciiva.com/16208/mur120-d-16208137.pdf, ComponentLink7URL=https://datasheet.ciiva.com/16208/mur120-d-16208137.pdf, Diode Configuration=Single, Diode Type="Fast Recovery", No. of Pins=2, Packaging=Each, Pricing 1="1=0.48, 10=0.362, 100=0.2254, 500=0.1541, 1000=0.1185 (USD)", Reverse Recovery Time trr Max=75ns, Stock 1=22453, Supplier 1=Ciiva, SVHC="No SVHC (16-Jun-2014)"
IOG_1 IOG_2 IOP_1 IOP_2 IOS1 IOS2: "Header, 8-Pin", LatestRevisionDate=17-Jul-2002, LatestRevisionNote="Re-released for DXP Platform.", Publisher="Altium Limited"
J1 J3: "Header, 4-Pin", LatestRevisionDate=17-Jul-2002, LatestRevisionNote="Re-released for DXP Platform.", Publisher="Altium Limited"
J2: "Header, 3-Pin", LatestRevisionDate=17-Jul-2002, LatestRevisionNote="Re-released for DXP Platform.", Publisher="Altium Limited"
J4: "Header, 20-Pin, Dual row", LatestRevisionDate=17-Jul-2002, LatestRevisionNote="Re-released for DXP Platform.", Publisher="Altium Limited"
P1: "Header, 2-Pin", LatestRevisionDate=17-Jul-2002, LatestRevisionNote="Re-released for DXP Platform.", Publisher="Altium Limited"
PWRN-: library part "Anderson-1Pin BLK_PCB_RHT", "1 pin Anderson", Current Rating="25 A", Manufacturer="Anderson Power Products (APP)", Manufacturer Part Number="1377G1, 1377G2, 1327-BK,137G6-BK", Supplier Part Number 1=879-1377G1, Voltage Rating="600 V", ComponentLink1Description=http://components.arrow.com/part/dataview/0323_01933244, ComponentLink1URL=http://components.arrow.com/part/dataview/0323_01933244, ComponentLink2Description=http://www.andersonpower.com/files.php?file=CAT-PPMP(4).pdf, ComponentLink2URL=http://www.andersonpower.com/files.php?file=CAT-PPMP(4).pdf, Contact Material="Copper Alloy", Contact Plating=Tin, Mouser=879-1327G6, Number of Positions / Contacts=1, Pricing 1="1=1.14, 10=1.14, 50=0.947, 100=0.901, 1000=0.777, 10000=0.777 (USD)", Product Type=Contacts, Series="PCB Powerpole", Stock 1=233, Supplier 1=Mouser, Supplier Part Number 2=879-1377G2, Supplier Part Number 3=879-1327G6, Supplier Part Number 4=879-1327, Termination Style=Solder
PWRP+: library part "Anderson-1Pin RED_PCB_RHT", "1 pin Anderson", Current Rating="25 A", Manufacturer="Anderson Power Products (APP)", Manufacturer Part Number="1377G1, 1377G2, 1327-BK,137G6-BK", Supplier Part Number 1=879-1377G1, Voltage Rating="600 V", ComponentLink1Description=http://components.arrow.com/part/dataview/0323_01933244, ComponentLink1URL=http://components.arrow.com/part/dataview/0323_01933244, ComponentLink2Description=http://www.andersonpower.com/files.php?file=CAT-PPMP(4).pdf, ComponentLink2URL=http://www.andersonpower.com/files.php?file=CAT-PPMP(4).pdf, Contact Material="Copper Alloy", Contact Plating=Tin, Mouser=879-1327G6, Number of Positions / Contacts=1, Pricing 1="1=1.14, 10=1.14, 50=0.947, 100=0.901, 1000=0.777, 10000=0.777 (USD)", Product Type=Contacts, Series="PCB Powerpole", Stock 1=233, Supplier 1=Mouser, Supplier Part Number 2=879-1377G2, Supplier Part Number 3=879-1327G6, Supplier Part Number 4=879-1327, Termination Style=Solder
Q1: "Power MOSFET, 20 V, 4.1 A, Dual N-Channel, 8-Pin CHIPFET, Tape and Reel", Current - Continuous Drain (Id) @ 25°C=3A, Drain to Source Voltage (Vdss)=20V, Input Capacitance (Ciss) @ Vds="180pF @ 10V", Manufacturer="On Semiconductor", Manufacturer Part Number=NTHD4508NT1G, Operating Temperature="-55°C ~ 150°C (TJ)", Package / Case="8-SMD, Flat Lead", Package Type=ChipFET-8, Power - Max=1.13W, Supplier Device Package=ChipFET™, Supplier Part Number 1=NTHD4508NT1GOSCT-ND, Category="Discrete Semiconductor Products", Channel Polarity="N Channel", Ciss Typ (pF)=180, ComponentLink1Description="Manufacturer URL", ComponentLink1URL=http://www.onsemi.com/, ComponentLink2Description=Datasheet, ComponentLink2URL=http://www.onsemi.com/pub_link/Collateral/NTHD4508N-D.PDF, ComponentLink3Description="Package Specification", ComponentLink3URL=http://www.onsemi.com/pub_link/Collateral/NTHC5513-D.PDF, Configuration=Dual, Coss Typ (pF)=80, Crss Typ (pF)=25, DatasheetVersion="Rev. 3", FET Feature="Logic Level Gate", FET Type="2 N-Channel (Dual)", Gate Charge (Qg) @ Vgs="4nC @ 4.5V", ID Max (A)=4.1, Mounting Technology="Surface Mount", Mounting Type="Surface Mount", PackageDescription="8-Pin ChipFET, Body 3.025 x 1.625 mm, Pitch 0.635 mm", PackageReference=CHIPFET-8-1206A-03_S2, PackageVersion="Rev. E, 10/2004", Packaging="Cut Tape (CT)", Packing="Tape and Reel", Part Status=Active, PartId=1, PartNumber=NTHD4508NT1, Pricing 1="1=0.53, 10=0.457, 100=0.3416, 500=0.26832, 1000=0.20685 (USD)", Qrr Typ (nC)=6, Rds On (Max) @ Id, Vgs="75 mOhm @ 3.1A, 4.5V", RoHS="RoHS Compliant", Stock 1=6850, Supplier 1=Digi-Key, V(BR)DSS Min (V)=20, VGS Max (V)=12, Vgs(th) (Max) @ Id="1.2V @ 250µA", VGS(th) Max (V)=1.2
R1 R3 R4: library part P_R0603_10K/1%, "Resistor 10K ±1% 0.1W 0603", Power=0.1W, Supplier Part Number 1=311-10.0KHRTR-ND, Tolerance=±1%, Codigo=002.05.107, ComponentLink1Description=Datasheet, ComponentLink1URL=https://www.yageo.com/upload/media/product/productsearch/datasheet/rchip/PYu-RC_Group_51_RoHS_L_11.pdf, ComponentLink2Description="Manufacturer URL", ComponentLink2URL=https://www.yageo.com/en/Home, Empresa=02, GEOMETRY=NO, Mounting=SMT, Part_Name=P_R0603_10K/1%, Supplier 1=Digi-Key
R2 RT1: library part Res_0603, Case Code - in=0603, Case Code - mm=1608, Manufacturer=Yageo, Manufacturer Part Number=RT0603DRD0722KL, Operating Temperature Range="- 55 C to + 125 C", Package / Case="0603 (1608 metric)", Power Rating="100 mW", Resistance="22 kOhms", Supplier Part Number 1=311-22KDDKR-ND, Temperature Coefficient="25 PPM / C", Tolerance="0.5 %", Voltage Rating="75 V", Brand=Yageo, ComponentLink1Description=https://datasheet.ciiva.com/12810/pyu-rt-1-to-0-05-rohs-l-4-12810773.pdf, ComponentLink1URL=https://datasheet.ciiva.com/12810/pyu-rt-1-to-0-05-rohs-l-4-12810773.pdf, Height="0.45 mm", Length="1.6 mm", Packaging=Reel, Pricing 1="1=0.12, 10=0.104, 25=0.0716, 50=0.0558, 100=0.0399, 250=0.0311, 500=0.0247, 1000=0.0175 (USD)", Product="Thin Film Resistors SMD", Product Category="Thin Film Resistors - SMD", RoHS=True, Series=RT, Stock 1=39729, Supplier 1=Digikey, Termination Style=SMD/SMT, Type="High Precision, High Stability", Unit Weight="0.000071 oz", Width="0.8 mm"
RCAN1: library part Res4K99_0603, Manufacturer=Yageo, Manufacturer Part Number=RT0603DRD074K99L, Operating Temperature="-55°C ~ 155°C", Package / Case="0603 (1608 Metric)", Power (Watts)="0.1W, 1/10W", Resistance (Ohms)=4.99k, Supplier Device Package=0603, Supplier Part Number 1=311-4.99KDCT-ND, Temperature Coefficient=±25ppm/°C, Tolerance=±0.5%, Category=Resistors, ComponentLink1Description=http://www.yageo.com/documents/recent/PYu-RT_1-to-0.05_RoHS_L_6.pdf, ComponentLink1URL=http://www.yageo.com/documents/recent/PYu-RT_1-to-0.05_RoHS_L_6.pdf, Composition="Thin Film", Failure Rate=-, Features="Moisture Resistant", Height="0.022\" (0.55mm)", Number of Terminations=2, Packaging="Cut Tape (CT)", Part Status=Active, Pricing 1="1=0.22, 10=0.184, 25=0.134, 100=0.0721, 250=0.05532, 500=0.04358, 1000=0.03018, 2500=0.02766 (USD)", RoHS="RoHS Compliant", Size / Dimension="0.063\" L x 0.031\" W (1.60mm x 0.80mm)", Stock 1=28874, Supplier 1=Digi-Key
RCH1 RCL1: library part Res330_0603, Manufacturer=Yageo, Manufacturer Part Number=RC0603JR-07330RL, Operating Temperature="-55°C ~ 155°C", Package / Case="0603 (1608 Metric)", Power (Watts)="0.1W, 1/10W", Resistance (Ohms)=330, Supplier Device Package=0603, Supplier Part Number 1=311-330GRCT-ND, Temperature Coefficient=±100ppm/°C, Tolerance=±5%, Category=Resistors, ComponentLink1Description=http://www.yageo.com/documents/recent/PYu-RC_Group_51_RoHS_L_04.pdf, ComponentLink1URL=http://www.yageo.com/documents/recent/PYu-RC_Group_51_RoHS_L_04.pdf, Composition="Thick Film", Failure Rate=-, Features="Moisture Resistant", Height="0.022\" (0.55mm)", Number of Terminations=2, Packaging="Cut Tape (CT)", Part Status=Active, Pricing 1="1=0.1, 10=0.011, 25=0.008, 100=0.0044, 250=0.00336, 500=0.0027, 1000=0.00198, 2500=0.00172 (USD)", RoHS="RoHS Compliant", Size / Dimension="0.063\" L x 0.031\" W (1.60mm x 0.80mm)", Stock 1=1303594, Supplier 1=Digi-Key
Reg3: library part CMP-0062-01788-3, "1A Low Dropout Regulator for 5V to 3.3V Conversion, 4-pin SOT-223, Pb-Free", Dropout Voltage@Current (Typ)=0.5@1A/0.11@100mA, Input Voltage=7.5V, Input Voltage (Min)=4.5V, Manufacturer="Texas Instruments", Manufacturer Part Number=LM3940IMP-3.3/NOPB, Operating Temp Range="-40C to 125C", Operating Temperature Classification=Automotive, Output Current=1A, Package Type=SOT-223, PackageTopMarking=XYTT*L52B, PowerWise=N, Quiescent Current (Max)=15mA, Supplier Part Number 1=LM3940IMP-3.3/NOPBDKR-ND, Voltage Regulator Type=LDO, Code_IPC=SOT223-4, Code_JEDEC=TO-261-AA, ComponentLink1Description="Datasheet URL", ComponentLink1URL=http://www.ti.com/general/docs/lit/getliterature.tsp?genericPartNumber=LM3940&fileType=pdf, ComponentLink2Description=https://datasheet.ciiva.com/48433/elnatsemico-spanungsregler-ldo-lm3940-en-48433415.pdf, ComponentLink2URL=https://datasheet.ciiva.com/48433/elnatsemico-spanungsregler-ldo-lm3940-en-48433415.pdf, ComponentLink3Description=https://datasheet.ciiva.com/49046/1896170-49046286.pdf, ComponentLink3URL=https://datasheet.ciiva.com/49046/1896170-49046286.pdf, ComponentLink4Description=https://datasheet.ciiva.com/46384/1882650-46384431.pdf, ComponentLink4URL=https://datasheet.ciiva.com/46384/1882650-46384431.pdf, CompType="LDO IC", Line Regulation=40mV, Load Regulation=50mV, Mounting="Surface Mount", Number of Outputs=1, Output Voltage=3.3V, PackageDescription="Molded SOT-223, 6.50 x 3.56 x 1.6mm Body, 4 Lead, 2.3mm Pitch", PackageReference=DCY0004A, Packaging="Tape and Reel", Pin Count="3 +Tab", PinCount=4, Polarity Type=Positive, Pricing 1="1=1.49, 10=1.332, 100=1.0381, 500=0.8585 (USD)", Regulator Output Type=Fixed, RoHS=Y, Stock 1=22816, Supplier 1=Digikey, Topology=LDO
Reg5: library part CMP-0062-00575-4, "5A Low Dropout Positive Regulators, 3-pin TO-263, Pb-Free", Manufacturer="Texas Instruments", PackageTopMarking=NSUZXYTTE#*LM1084*IS-5.0, PowerWise=N, Code_JEDEC=MO-169-AA, ComponentLink1Description="Datasheet URL", ComponentLink1URL=http://www.ti.com/general/docs/lit/getliterature.tsp?genericPartNumber=LM1084&fileType=pdf, CompType="LDO IC", High-Reliability=Y, PackageDescription="TO-263, Molded, .400 x .390 x .180in, 3 Lead, .1in Pitch, Surface Mount", PackageReference=KTT0003B, PartNumber=LM1084IS-5.0/NOPB, PinCount=3, RoHS=Y
RL1 RL2: library part Res1K_0805, Manufacturer="Panasonic Electronic Components", Manufacturer Part Number=ERJ-6GEYJ102V, Operating Temperature="-55°C ~ 155°C", Package / Case="0805 (2012 Metric)", Power (Watts)="0.125W, 1/8W", Resistance (Ohms)=1k, Supplier Device Package=0805, Supplier Part Number 1=P1.0KACT-ND, Temperature Coefficient=±200ppm/°C, Tolerance=±5%, Category=Resistors, ComponentLink1Description=http://industrial.panasonic.com/www-cgi/jvcr13pz.cgi?E+PZ+3+AOA0001+ERJ6GEYJ102V+7+WW, ComponentLink1URL=http://industrial.panasonic.com/www-cgi/jvcr13pz.cgi?E+PZ+3+AOA0001+ERJ6GEYJ102V+7+WW, Composition="Thick Film", Failure Rate=-, Features="Automotive AEC-Q200", Height="0.028\" (0.70mm)", Number of Terminations=2, Packaging="Cut Tape (CT)", Part Status=Active, Pricing 1="1=0.1, 50=0.015, 100=0.011, 250=0.0084, 500=0.00674, 1000=0.00496 (USD)", RoHS="RoHS Compliant", Size / Dimension="0.079\" L x 0.049\" W (2.00mm x 1.25mm)", Stock 1=1669380, Supplier 1=Digi-Key
RLY1_+ RLY1_Rtn RLY2_+ RLY2_Rtn: "1 pin Anderson", Current Rating="25 A", Manufacturer="Anderson Power Products (APP)", Manufacturer Part Number="1377G1, 1377G2, 1327-BK,137G6-BK", Supplier Part Number 1=879-1377G2, Voltage Rating="600 V", ComponentLink1Description=http://components.arrow.com/part/dataview/0323_01933244, ComponentLink1URL=http://components.arrow.com/part/dataview/0323_01933244, ComponentLink2Description=http://www.andersonpower.com/files.php?file=CAT-PPMP(4).pdf, ComponentLink2URL=http://www.andersonpower.com/files.php?file=CAT-PPMP(4).pdf, Contact Material="Copper Alloy", Contact Plating=Tin, Mouser=879-1327G6, Number of Positions / Contacts=1, Pricing 1="1=1.14, 10=1.14, 50=0.947, 100=0.901, 1000=0.777, 10000=0.777 (USD)", Product Type=Contacts, Series="PCB Powerpole", Stock 1=233, Supplier 1=Mouser, Termination Style=Solder
  RLY1_+ RLY2_+: Supplier Part Number 2=879-1327
  RLY1_Rtn RLY2_Rtn: Supplier Part Number 2=879-1327G6
U1: library part CMP-1527-00010-2, "CMOS Quad Low-to-High Voltage Level Shifter, 3 to 18 V, -55 to 125 degC, 16-Pin TSSOP (PW16), RoHS, Tube", Manufacturer="Texas Instruments", Package Reference=PW0016A, Temperature Range="-55 to 125 degC", ComponentLink1Description="Manufacturer URL", ComponentLink1URL=www.ti.com, ComponentLink2Description=Datasheet, ComponentLink2URL=http://www.ti.com/lit/ds/symlink/cd40109b.pdf, ComponentLink3Description="Package Specification", ComponentLink3URL=http://www.ti.com/lit/ml/mpds361/mpds361.pdf, DatasheetVersion=SCHS099B, Mounting Technology="Surface Mount", Number of Bits=4, Number of Channels=4, Number of Outputs=4, PackageDescription="16-Pin Plastic Small Outline Package, Body 5 x 4.4 mm, Pitch 0.65 mm", PackageVersion=4040064-4/G, Packing=Tube, PartNumber=CD40109BPW, Propagation Delay="240 ns Max.", RoHS=TRUE, VSS="3 to 18 V"
UC1: library part CMP-0186-00035-2, "Stand-Alone CAN Controller With SPI Interface, 18-Pin SOIC, Extended Temperature", Code_JEDEC=MS-013, ComponentLink1Description="Manufacturer URL", ComponentLink1URL=http://www.microchip.com/, ComponentLink2Description=Datasheet, ComponentLink2URL=http://ww1.microchip.com/downloads/en/DeviceDoc/21801f.pdf, ComponentLink3Description="Package Specification", ComponentLink3URL=http://www.microchip.com/stellent/groups/techpub_sg/documents/packagingspec/en012702.pdf, DatasheetVersion="revF, Oct-2010", PackageDescription="18-Lead Plastic Small Outline (SO) - Wide 7.50mm Body [SOIC]", PackageReference=SOIC-SO18, PackageVersion="revBB, Aug-2009", RevisionNote="URLs added. DatasheetVersion updated."